# Altium PCB placa.PcbDoc
Units mm, origin at the board's own origin, x right, y up, seen from the top; angles counter-clockwise.
Board outline 99.95 x 99.95 mm, 2 copper layers (Top Layer, Bottom Layer); 28 components, 21 nets, 104 pads, 0 vias.
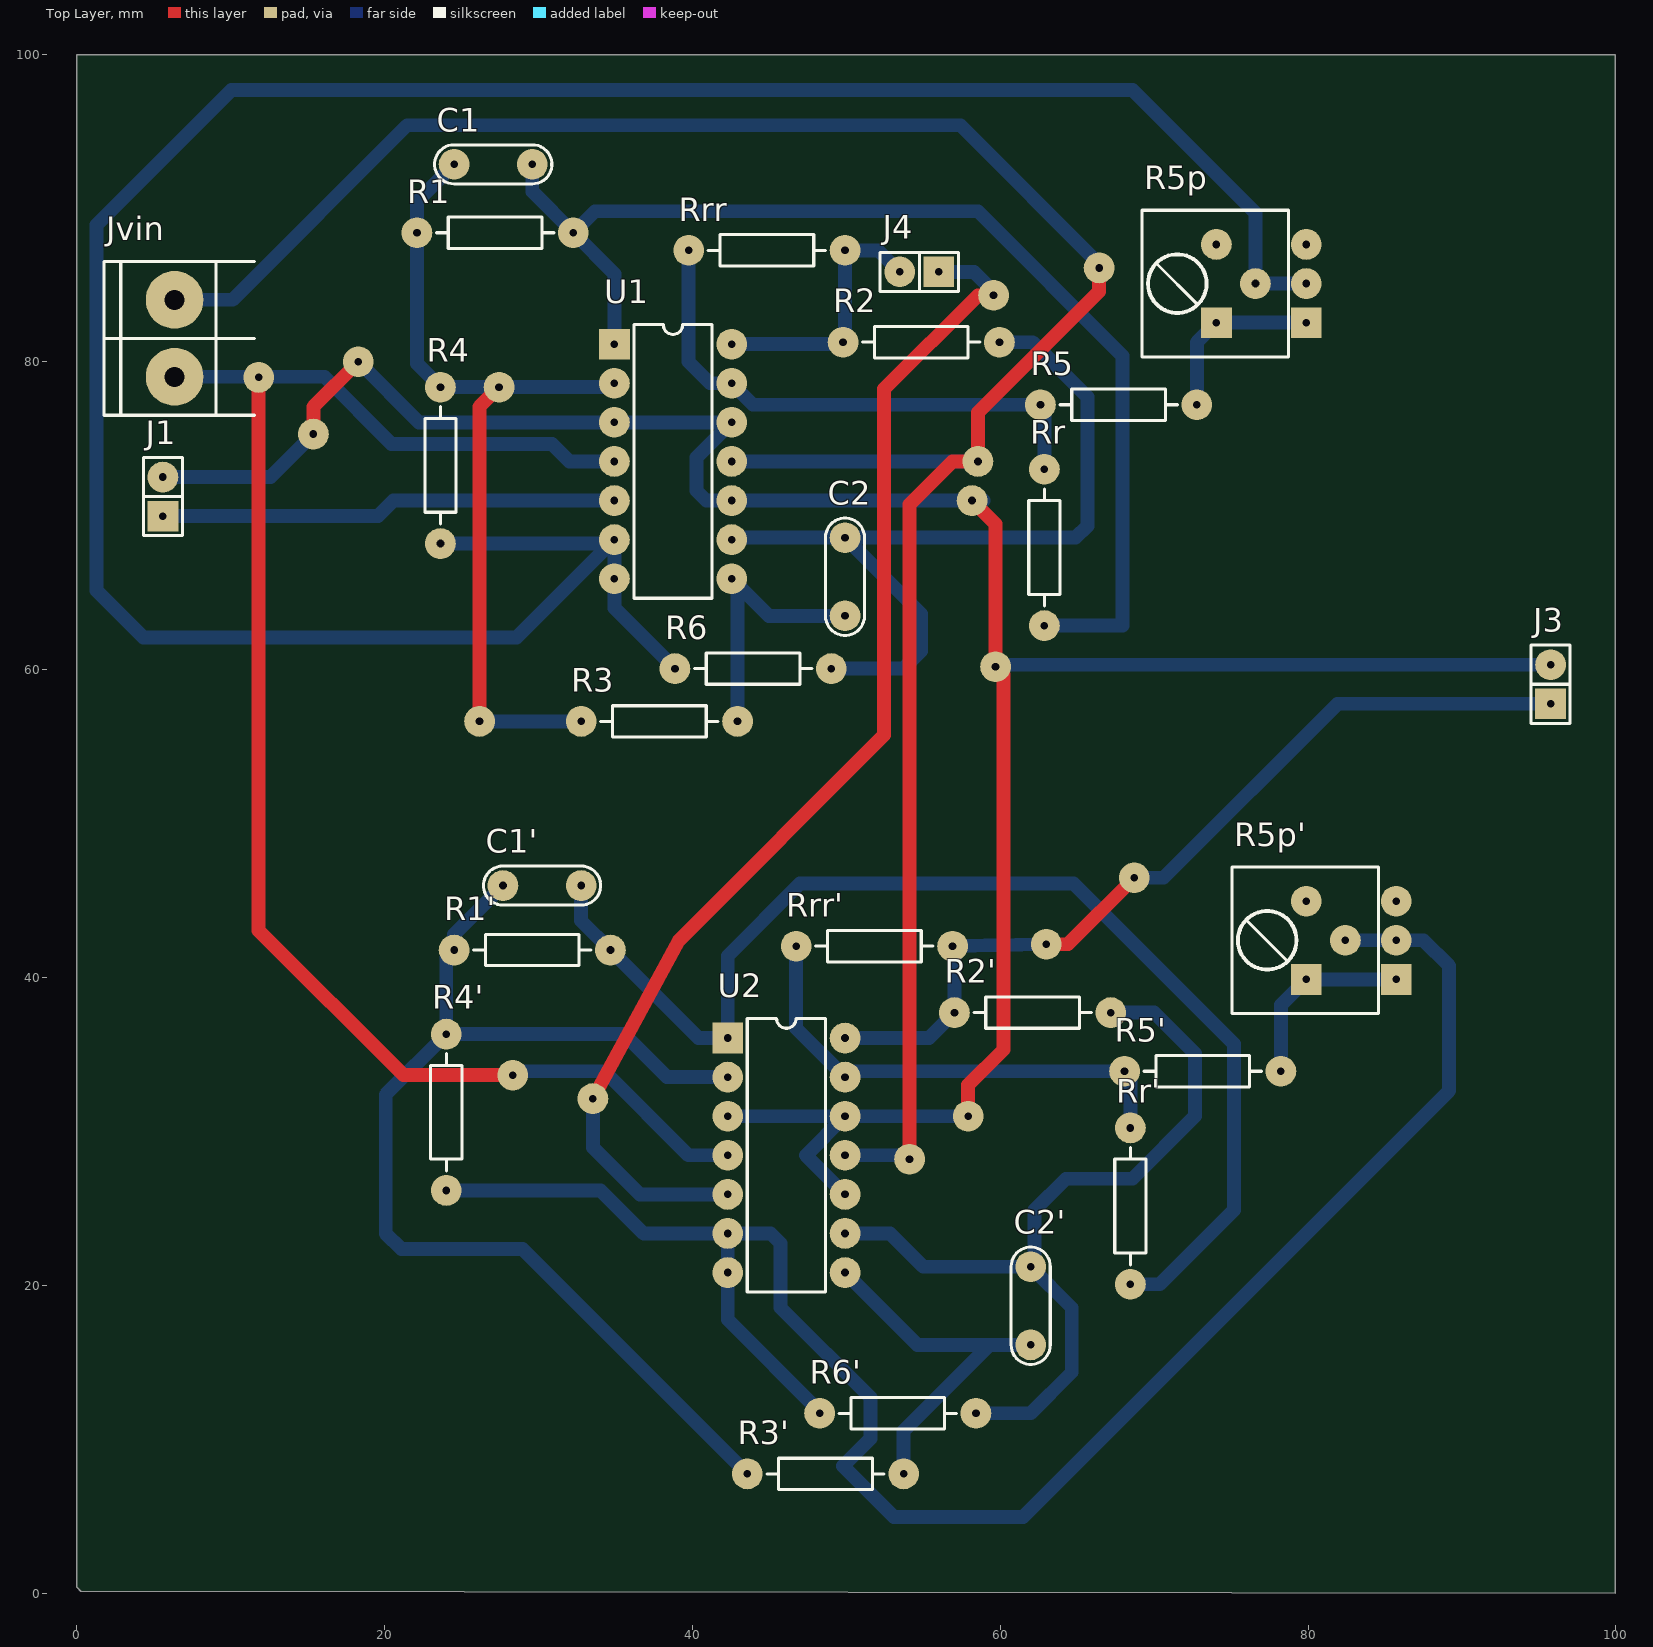
[diagram p0: Top Layer view]
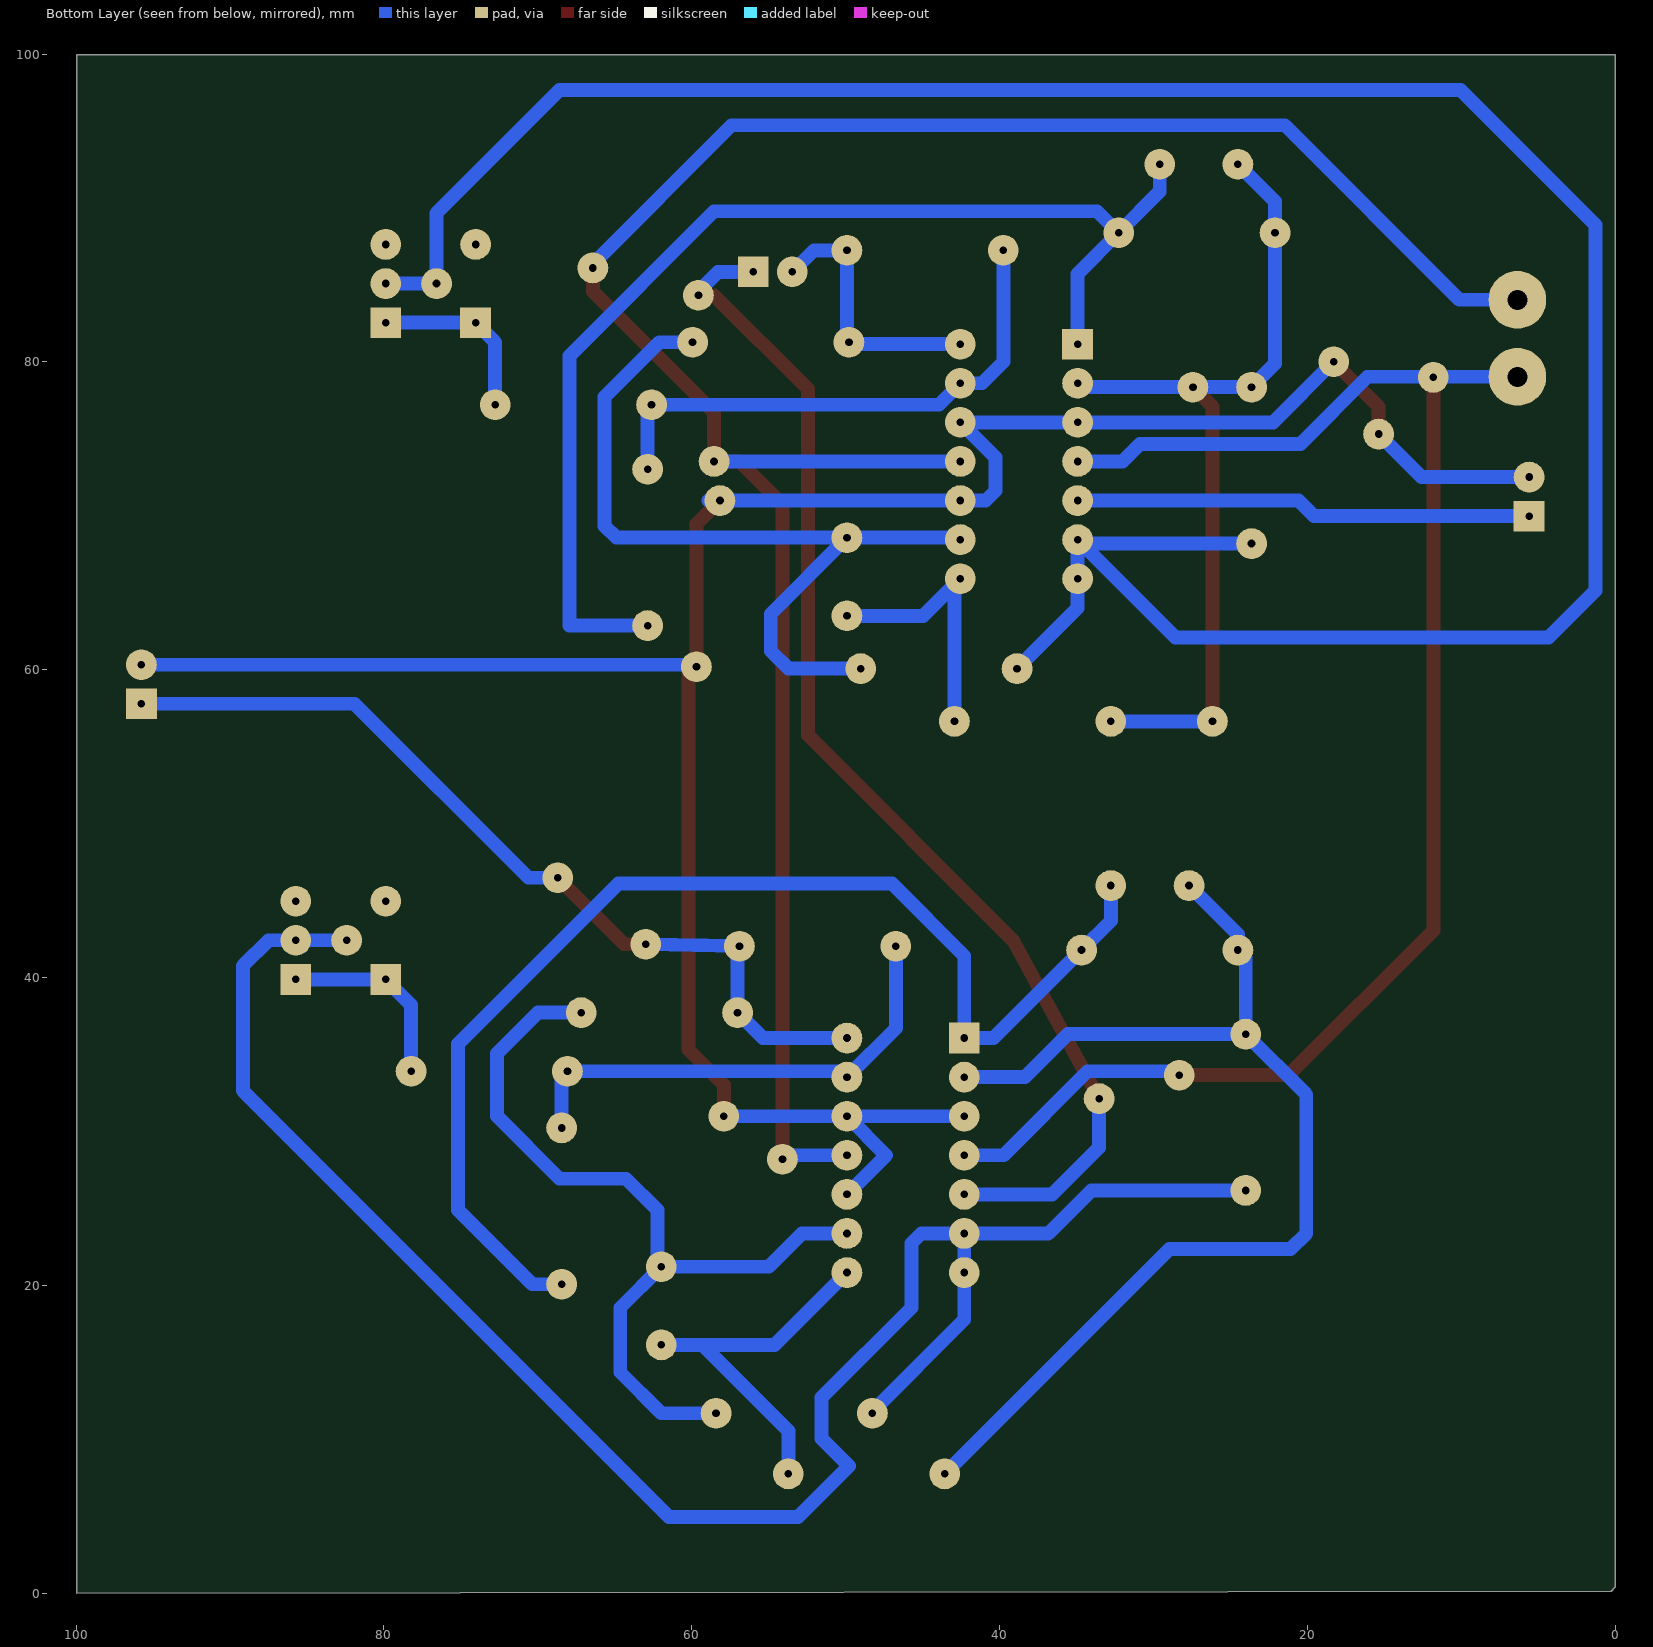
[diagram p1: Bottom Layer view, seen from below]
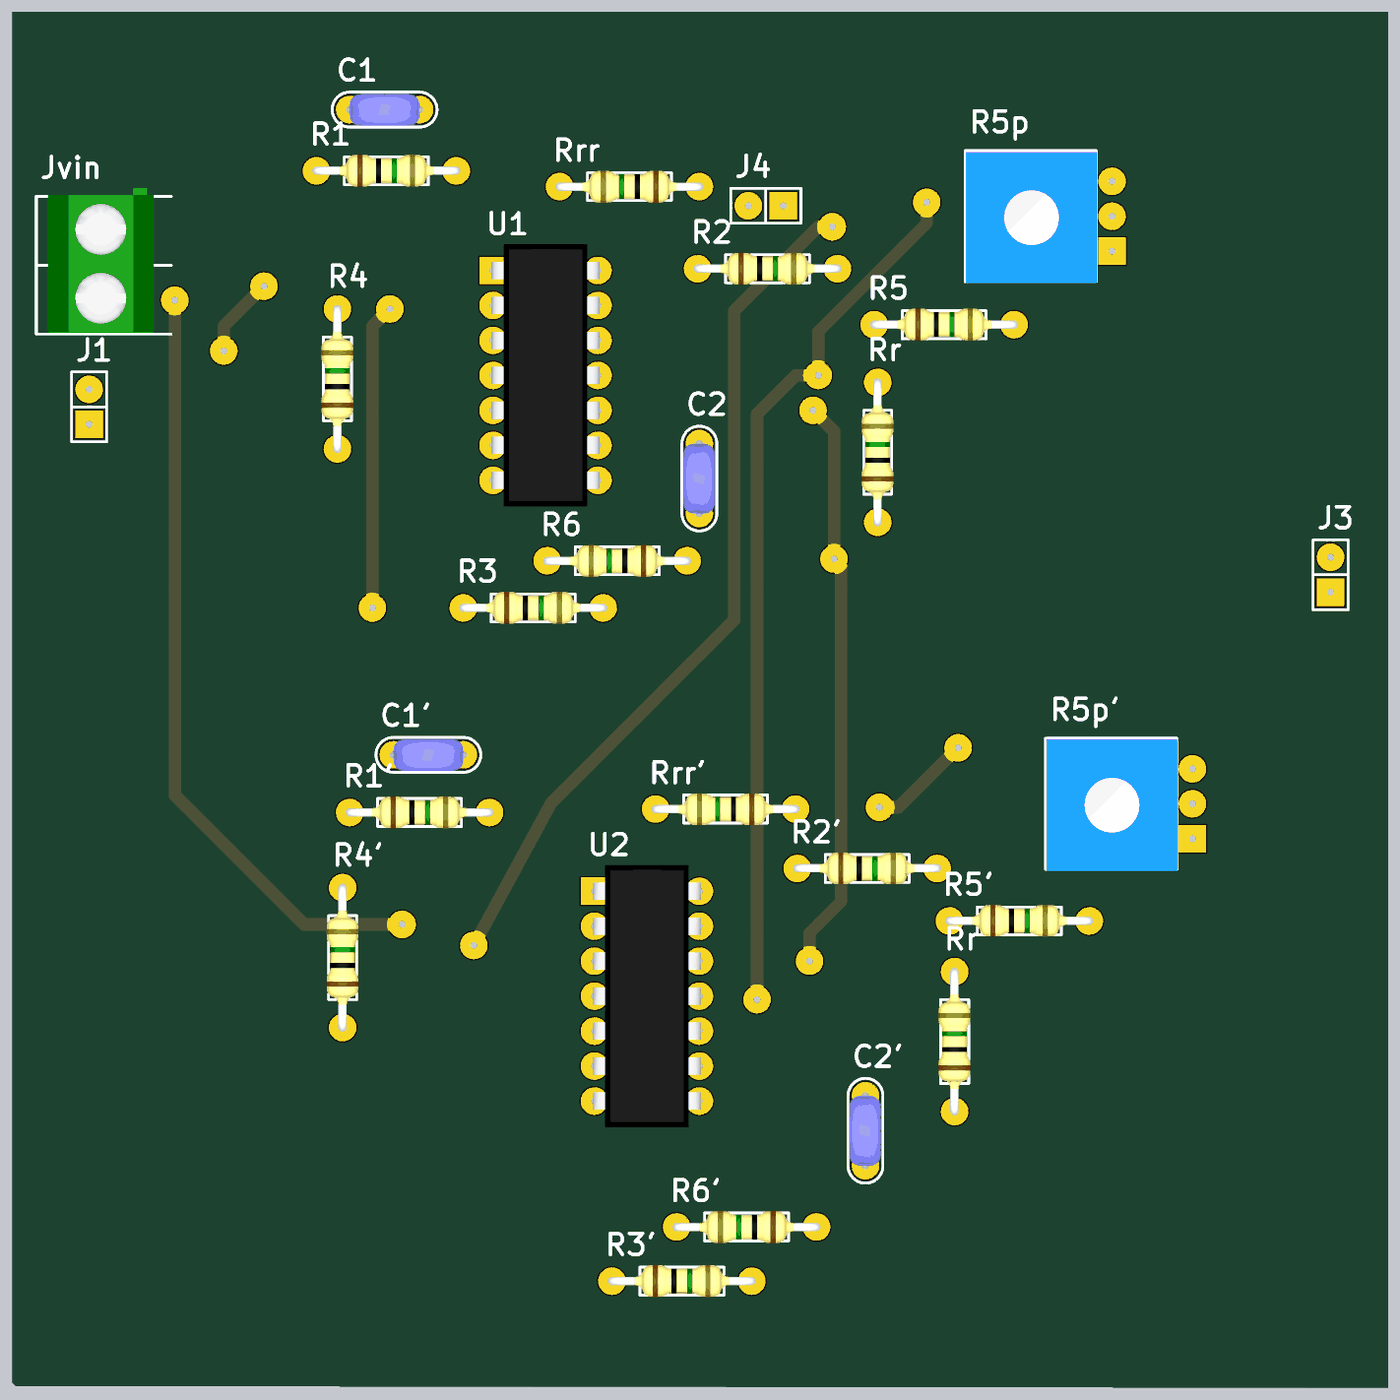
[diagram p2: 3D render of the assembled board from above, using the file's embedded part models]

## Layer stack, top to bottom
Top Solder: solder mask 0.0102, Solder Resist, Dk 3.5
Top Layer: signal copper 0.0356
Dielectric 1: dielectric 0.32, FR-4, Dk 4.8
Bottom Layer: signal copper 0.0356
Bottom Solder: solder mask 0.0102, Solder Resist, Dk 3.5

## Board outline
0.254,0.127 0,0.381 0,99.949 99.949,99.949 99.949,0

## Design rules (kind name [scope] priority, off if disabled: settings)
Clearance [All] p1: gap=0.3 ignorepadtopadclearanceinfootprint=FALSE
PolygonConnect [All] p1: connectstyle=Relief reliefconductorwidth=0.254 reliefentries=4 polygonreliefangle="90 Angle" airgapwidth=0.254
RoutingVias [All] p1: holewidth=0.711 width=1.27 viastyle="Through Hole" minholewidth=0.711 minwidth=1.27 maxholewidth=0.711 maxwidth=1.27
SolderMaskExpansion [All] p1: expansion=0.102
Width [All] p1: maxlimit=0.9 minlimit=0.9 preferedwidth=0.9
30 further rules are at their usual default settings.

## Components (designator, comment, footprint, x,y, rotation, side; value= is the part's Value field where it differs from the comment)
C1 "CAP" CAP200 27.051,92.837 r0 top
C1' "CAP" CAP200 30.226,45.974 r0 top
C2 "CAP" CAP200 49.911,66.04 r270 top
C2' "CAP" CAP200 61.976,18.669 r270 top
J1 "CON2" SIP2 5.588,71.247 r90 top
J3 "CON2" SIP2 95.758,59.055 r90 top
J4 "CON2" SIP2 54.737,85.852 r180 top
Jvin "BORNERA 2" BORNERA2 6.35,81.534 r0 top
R1 "RES" RES400 22.098,88.392 r0 top
R1' "RES" RES400 24.511,41.783 r0 top
R2 "RES" RES400 49.784,81.28 r0 top
R2' "RES" RES400 57.023,37.719 r0 top
R3 "RES" RES400 32.766,56.642 r0 top
R3' "RES" RES400 43.561,7.747 r0 top
R4 "RES" RES400 23.622,68.199 r90 top
R4' "RES" RES400 24.003,26.162 r90 top
R5 "RES" RES400 62.611,77.216 r0 top
R5' "RES" RES400 68.072,33.909 r0 top
R5p "PRESET" "PRESET H" 74.041,85.05 r90 top
R5p' "PRESET" "PRESET H" 79.883,42.378 r90 top
R6 "RES" RES400 49.022,60.071 r180 top
R6' "RES" RES400 58.42,11.684 r180 top
Rr "RES" RES400 62.865,62.865 r90 top
Rr' "RES" RES400 68.453,20.066 r90 top
Rrr "RES" RES400 49.911,87.249 r180 top
Rrr' "RES" RES400 56.896,42.037 r180 top
U1 "IC_DIP14" DIP14 34.925,81.153 r0 top
U2 "IC_DIP14" DIP14 42.291,36.068 r0 top

## Footprints (in the part's own frame and the unit in brackets; to place one, negate y for a bottom-side part, rotate by r counter-clockwise, add the part's x,y. Pads: shape width x height; smd on the part's side, far side on the other; paste and mask are expansions set on the pad)
BORNERA2 [mm] "Bornera con Tornillos 5mm separación"
  round 3.75 hole 1.3: 1(0,2.5) 2(0,-2.5)
  silkscreen extent -4.6,-5 5.2,5, body extent -3.76,-4.89 3.94,5.61, height 10
CAP200 [mm]
  round 2 hole 0.5: 1(-2.54,0) 2(2.54,0)
  silkscreen extent -3.81,-1.27 3.81,1.27, body extent -2.79,-1.17 2.79,1.12, height 6.24
DIP14 [mm]
  rect 2x2 hole 0.5: 1(0,0)
  round 2 hole 0.5: 2(0,-2.54) 3(0,-5.08) 4(0,-7.62) 5(0,-10.16) 6(0,-12.7) 7(0,-15.24) 8(7.62,-15.24) 9(7.62,-12.7) 10(7.62,-10.16) 11(7.62,-7.62) 12(7.62,-5.08) 13(7.62,-2.54) 14(7.62,0)
  silkscreen extent 1.27,-16.51 6.35,1.27, body extent -0.13,-17.14 7.75,1.9, height 4.19
"PRESET H" [mm]
  rect 2x2 hole 0.5: 1(-2.5,-5.842) 1(-2.5,0)
  round 2 hole 0.5: 2(0.04,-2.54) 2(0.04,-5.842) 3(2.58,0) 3(2.58,-5.842)
  silkscreen extent -4.72,-4.7 4.8,4.83, body extent -4.83,-4.76 4.7,4.77, height 5
RES400 [mm]
  round 2 hole 0.5: 1(0,0) 2(10.16,0)
  silkscreen extent 1.27,-1.02 8.89,1.02, body extent -0.3,-1.14 10.46,1.17, height 2.43
SIP2 [mm]
  rect 2x2 hole 0.5: 1(-1.27,0)
  round 2 hole 0.5: 2(1.27,0)
  silkscreen extent -2.54,-1.27 2.54,1.27

## Free pads (board coordinates)
  round 2 hole 0.5: 2(18.288,80.01) 3(15.367,75.311) 4(26.162,56.642) 5(27.432,78.359) 6(68.707,46.482) 7(62.992,42.164) 8(66.421,86.106) 9(58.547,73.533) 10(58.166,70.993) 11(59.69,60.198) 12(57.912,30.988) 13(54.102,28.194) 14(59.563,84.328) 15(33.528,32.131) 17(28.321,33.655) 18(11.811,78.994)

## Nets (pads, with @x,y where several pads share a name; then routed paths per layer and width w, separated by ;. In a path a pad name is that pad's centre, name@x,y a point inside that pad or via, vN(x,y) a via of type N, cw(c..) or ccw(c..) an arc to the next point about the centre after c; other vN are vias at no path point)
-VCC: Jvin.1 pad.8 pad.9 pad.13 U1.11 U2.11 | length 154
  Top Layer w0.9: pad.13 54.102,70.739 56.896,73.533 pad.9 58.547,76.708 66.421,84.582 pad.8
  Bottom Layer w0.9: Jvin.1 10.12,84.034 21.463,95.377 57.404,95.377 pad.8@66.675,86.106 ; U1.11 pad.9 58.928,73.533 pad.9@59.055,73.66 ; U2.11 54.356,28.448 pad.13@54.483,28.575
GND: J1.2 J3.2 pad.2 pad.3 pad.10 pad.11 pad.12 U1.3 U1.10 U1.12 U2.3 U2.10 U2.12 | length 168.7
  Top Layer w0.9: pad.3 15.367,77.089 pad.2 ; pad.12 57.912,33.02 60.198,35.306 60.198,59.69 pad.11 59.69,69.469 pad.10
  Bottom Layer w0.9: J1.2 12.573,72.517 pad.3 pad.3@15.494,75.438 ; pad.2@18.288,80.137 pad.2 22.225,76.073 U1.3 U1.12 40.259,73.787 40.259,71.628 40.894,70.993 U1.10 pad.10 pad.10@58.928,70.993 ; U2.3 U2.12 ; U2.10 47.371,28.448 U2.12 ; pad.12@58.166,30.988 pad.12 U2.12 ; pad.11@59.309,60.325 J3.2
in: R4.1 R5p.2 R6.2 U1.6 U1.7 | length 172.5
  Bottom Layer w0.9: R4.1 U1.6@34.671,68.199 ; R6.2 34.925,64.008 U1.7 U1.6 U1.6@34.671,68.199 ; R5p.2@79.883,85.09 76.581,85.09 76.581,89.662 68.58,97.663 10.033,97.663 1.27,88.9 1.27,65.151 4.318,62.103 28.575,62.103 U1.6@34.671,68.199
in': R4'.1 R5p'.2 R6'.2 U2.6 U2.7 | length 122.7
  Bottom Layer w0.9: R4'.1 34.036,26.162 36.83,23.368 U2.6 ; R6'.2 48.26,11.811 42.291,17.78 U2.7 U2.6 ; R5p'.2@82.423,42.418 85.725,42.418 87.503,42.418 89.154,40.767 89.154,32.639 61.468,4.953 53.086,4.953 49.784,8.255 51.562,10.033 51.562,12.7 45.72,18.542 45.72,22.733 45.085,23.368 U2.6
NetC1'_1: C1'.1 R1'.1 R3'.1 R4'.2 U2.2 | length 75.2
  Bottom Layer w0.9: C1'.1 24.511,42.799 R1'.1 24.003,41.275 R4'.2 ; U2.2 38.354,33.528 35.56,36.322 R4'.2 ; R3'.1 28.956,22.352 21.082,22.352 20.066,23.368 20.066,32.385 R4'.2
NetC1'_2: C1'.2 R1'.2 Rr'.1 U2.1 | length 79
  Bottom Layer w0.9: C1'.2 32.766,43.688 R1'.2 40.386,36.068 U2.1 42.291,41.402 46.99,46.101 64.77,46.101 75.184,35.687 75.184,24.892 70.358,20.066 Rr'.1
NetC1_1: C1.1 pad.4 pad.5 R1.1 R3.1 R4.2 U1.2 | length 56.6
  Top Layer w0.9: pad.4 26.162,77.089 pad.5
  Bottom Layer w0.9: C1.1 22.098,90.424 R1.1 22.098,79.883 R4.2 pad.5 34.671,78.359 U1.2 ; pad.4@25.908,56.642 pad.4 R3.1
NetC1_2: C1.2 R1.2 Rr.1 U1.1 | length 76.7
  Bottom Layer w0.9: C1.2 29.591,91.059 R1.2 ; U1.1 34.925,85.725 R1.2 ; Rr.1 67.945,62.865 67.945,80.391 58.547,89.789 33.655,89.789 R1.2
NetC2'_1: C2'.1 R2'.2 R6'.1 U2.9 | length 55.6
  Bottom Layer w0.9: U2.9 52.832,23.368 54.991,21.209 C2'.1 ; R6'.1 61.976,11.684 64.643,14.351 64.643,18.542 C2'.1 ; R2'.2 69.977,37.719 72.644,35.052 72.644,30.988 68.58,26.924 64.262,26.924 62.23,24.892 62.23,21.463 C2'.1
NetC2'_2: C2'.2 R3'.2 U2.8 | length 24.7
  Bottom Layer w0.9: U2.8 54.61,16.129 59.309,16.129 ; R3'.2 53.721,10.541 59.309,16.129 ; C2'.2 59.309,16.129
NetC2_1: C2.1 R2.2 R6.1 U1.9 | length 54.8
  Bottom Layer w0.9: U1.9 42.672,68.58 C2.1 ; R6.1 53.721,60.071 54.864,61.214 54.864,63.627 C2.1 ; R2.2 62.103,81.28 65.659,77.724 65.659,69.342 64.897,68.58 C2.1
NetC2_2: C2.2 R3.2 U1.8 | length 17.3
  Bottom Layer w0.9: U1.8 U1.8@42.926,65.532 ; R3.2 U1.8@42.926,65.532 ; C2.2 44.958,63.5 U1.8@42.926,65.532
NetJ1_1: J1.1 U1.5 | length 29.8
  Bottom Layer w0.9: J1.1 19.558,69.977 20.574,70.993 U1.5
NetJ4_1: J4.1 pad.14 pad.15 U2.5 | length 80.3
  Top Layer w0.9: pad.15 39.116,42.418 52.451,55.753 52.451,78.232 58.547,84.328 pad.14
  Bottom Layer w0.9: pad.15 33.528,28.956 36.576,25.908 U2.5 ; J4.1 58.293,85.852 pad.14@59.817,84.328
NetR5'_1: R5'.1 Rr'.2 Rrr'.2 U2.13 | length 32
  Bottom Layer w0.9: Rrr'.2 46.736,36.703 U2.13 50.292,33.909 R5'.1 68.453,33.528 Rr'.2
NetR5'_2: R5'.2 R5p'.1 | length 12.5
  Bottom Layer w0.9: R5'.2 78.232,38.227 79.883,39.878 R5p'.1@85.725,39.878
NetR5_1: R5.1 Rr.2 Rrr.2 U1.13 | length 35.6
  Bottom Layer w0.9: Rrr.2 39.751,80.01 41.148,78.613 U1.13 43.942,77.216 R5.1 62.865,76.962 Rr.2
NetR5_2: R5.2 R5p.1 | length 11.7
  Bottom Layer w0.9: R5.2 72.771,81.28 74.041,82.55 R5p.1@79.883,82.55
ou1: J4.2 R2.1 Rrr.1 U1.14 | length 17.4
  Bottom Layer w0.9: U1.14 49.657,81.153 R2.1 49.911,81.407 Rrr.1 52.07,87.249 J4.2
out: J3.1 pad.6 pad.7 R2'.1 Rrr'.1 U2.14 | length 58.3
  Top Layer w0.9: pad.7 64.389,42.164 pad.6
  Bottom Layer w0.9: U2.14 55.372,36.068 R2'.1 57.023,41.91 Rrr'.1 pad.7 pad.7@62.484,42.037 ; pad.6@68.453,46.482 pad.6 70.612,46.482 81.915,57.785 J3.1
VCC: Jvin.2 pad.17 pad.18 U1.4 U2.4 | length 103.7
  Top Layer w0.9: pad.18 11.811,43.053 21.209,33.655 pad.17
  Bottom Layer w0.9: Jvin.2 16.089,79.034 20.447,74.676 30.861,74.676 32.004,73.533 U1.4 ; pad.17@28.067,33.909 34.29,33.909 39.751,28.448 U2.4
pads on no net: R5p'.3 R5p.3